# Altium PCB pc104_pattern.PcbDoc
Units mil, origin at the board's own origin, x right, y up, seen from the top; angles counter-clockwise.
Board outline 3550 x 3775 mil, 4 copper layers (HF Signal Layer, Ground, Supply Layer, LF Signal Layer), stack 62.087 mil thick; 2 components, 0 nets, 108 pads, 0 vias.
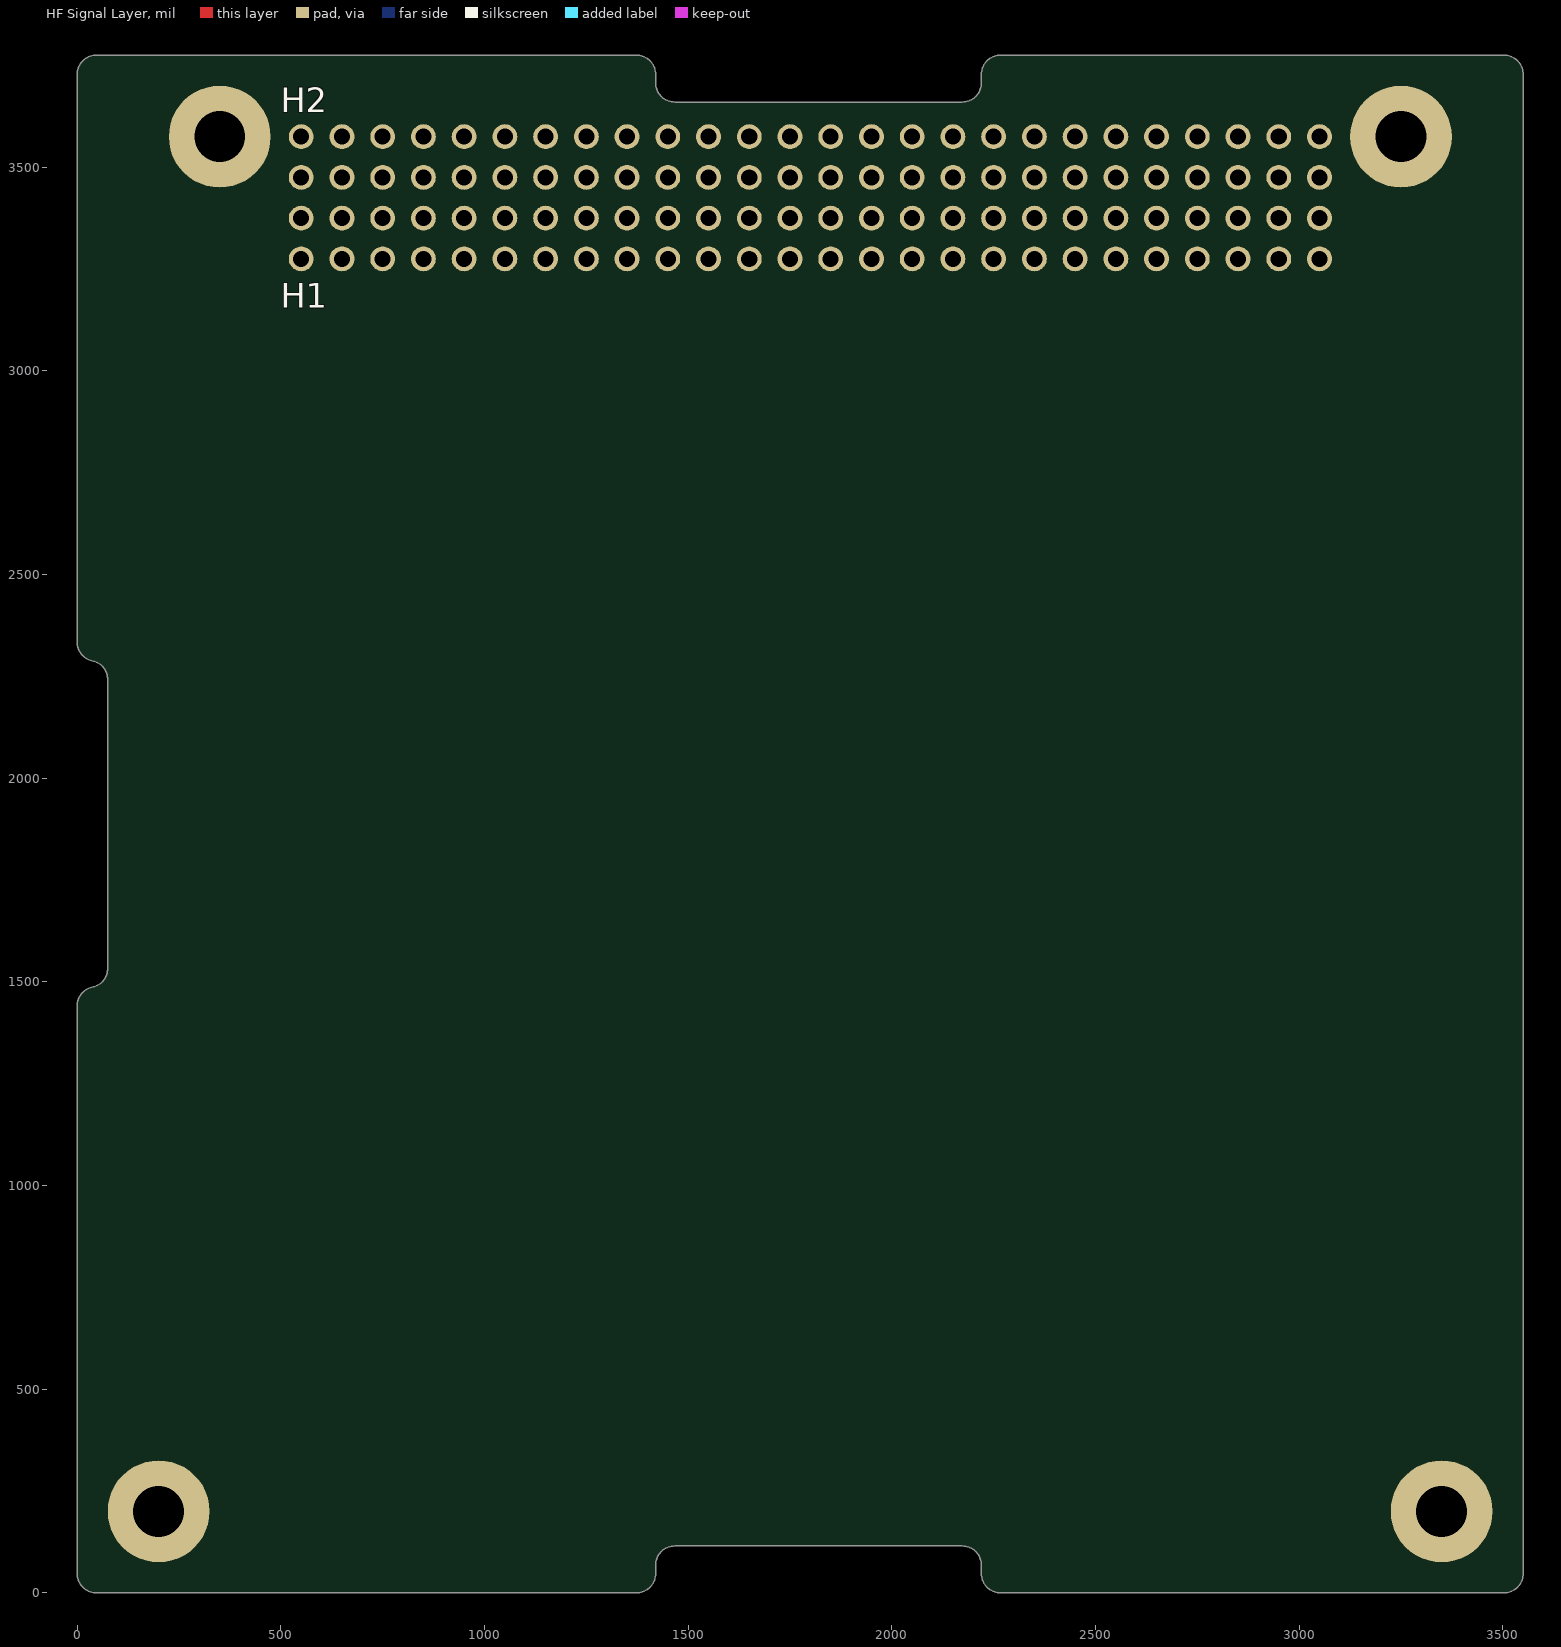
[diagram p0: HF Signal Layer view]
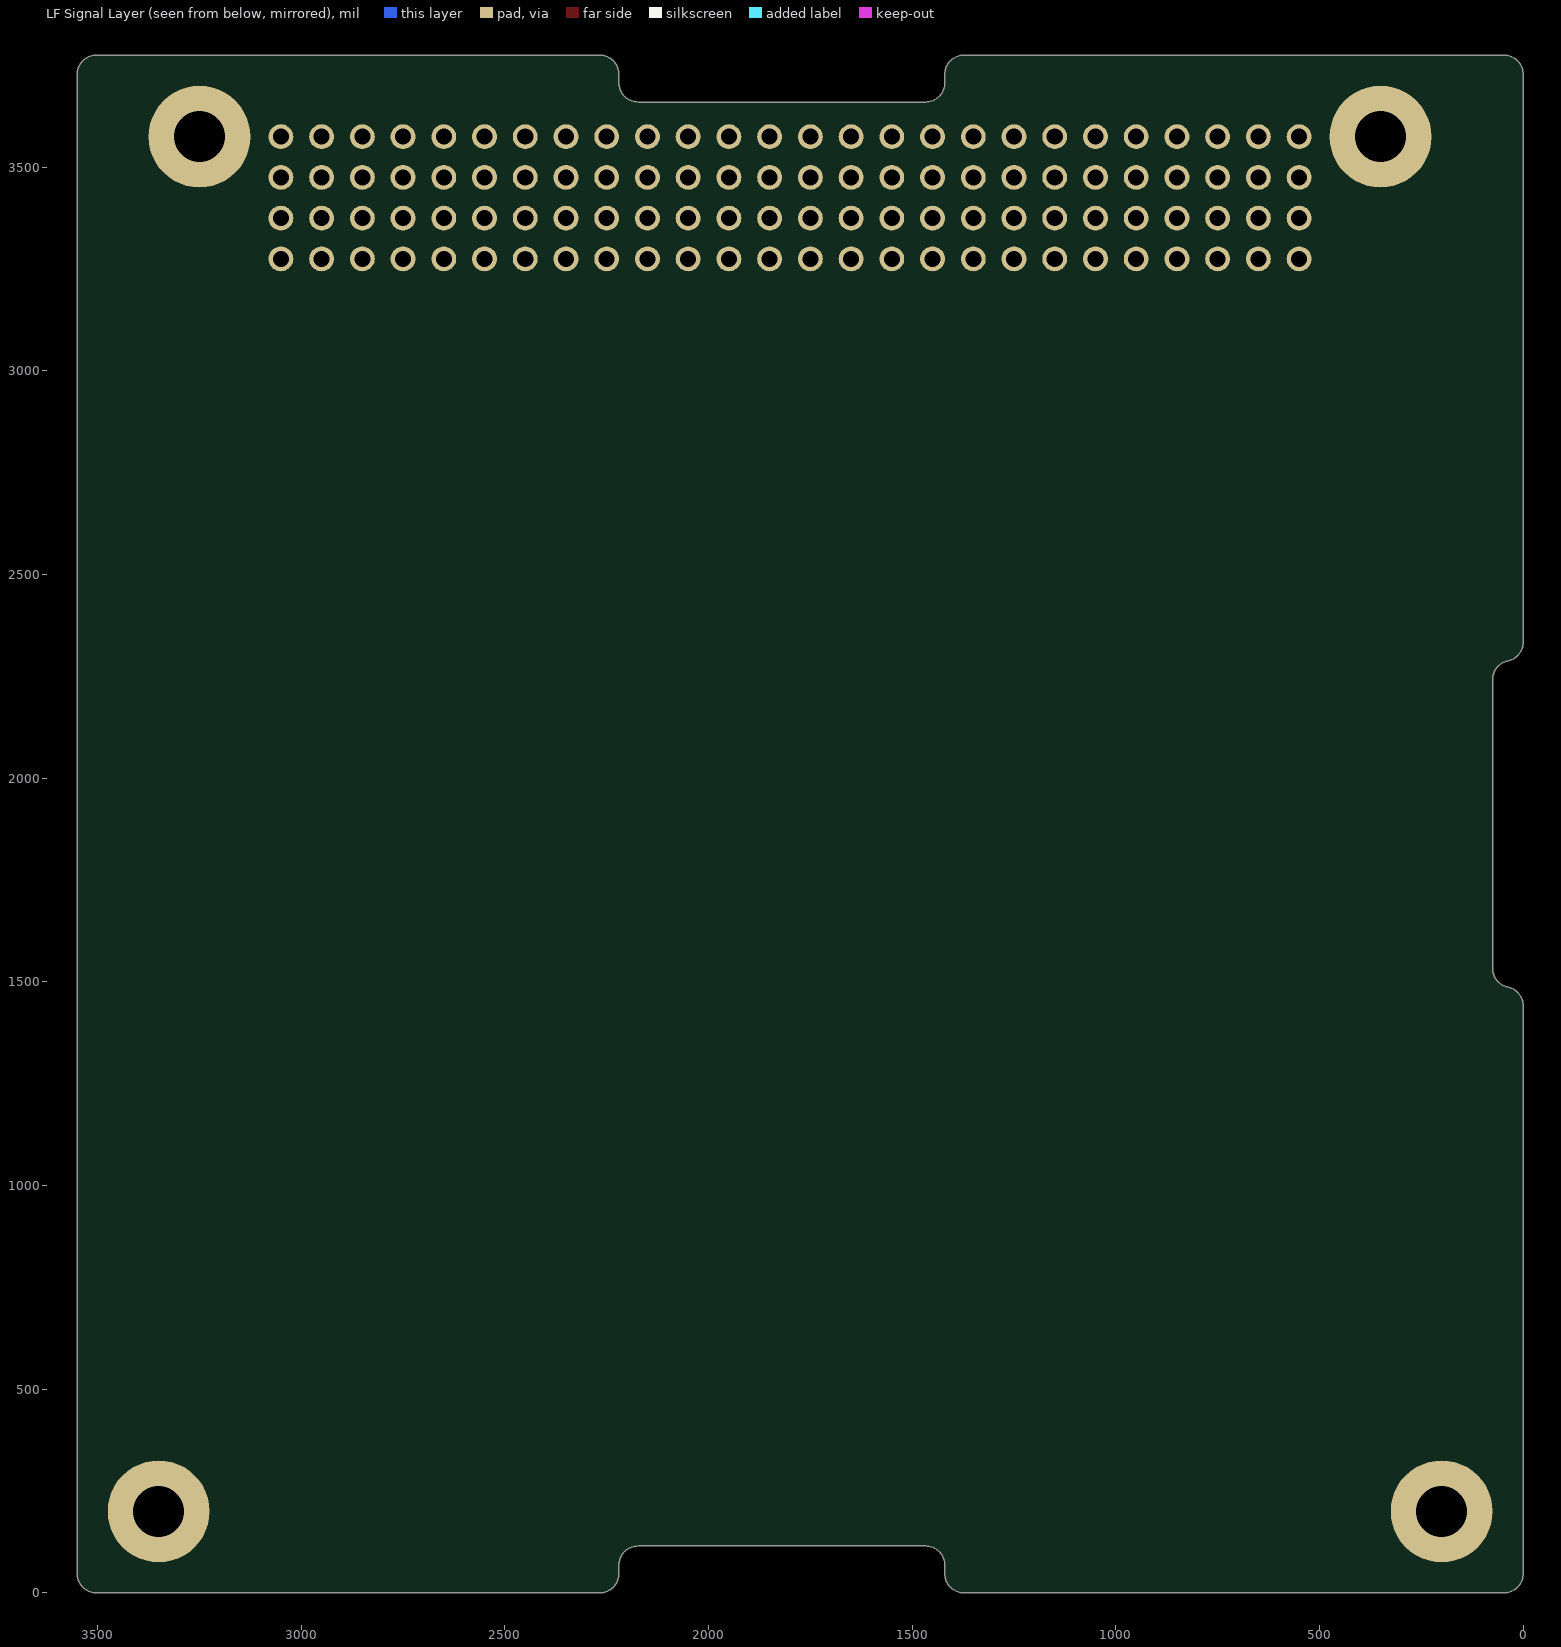
[diagram p1: LF Signal Layer view, seen from below]

## Layer stack, top to bottom
Top Solder: solder mask 0.3937, Solder Resist, Dk 3.5
HF Signal Layer: signal copper 0.7087
Dielectric Top: core 15, FR-4, Dk 4.2
Ground: signal copper 1.378
Dielectric Top-Bottom: prepreg 27.9134, FR-4, Dk 4.2
Supply Layer: signal copper 1.378
Dielectric Bottom: core 15, FR-4, Dk 4.2
LF Signal Layer: signal copper 0.7087
Bottom Solder: solder mask 0.3937, Solder Resist, Dk 3.5

## Board outline
47,0 cw(c47,47) 0,47 0,1441 cw(c47,1441) 39.65,1487.42 39.37,1487.4 ccw(c28,1533) 75,1533 75,2242 ccw(c28,2242) 39.37,2287.6 39.65,2287.58 cw(c47,2334) 0,2334 0,3728 cw(c47,3728) 47,3775 1373,3775 cw(c1373,3728) 1420,3728 1420,3707 ccw(c1467,3707) 1467,3660 2173,3660 ccw(c2173,3707) 2220,3707 2220,3728 cw(c2267,3728) 2267,3775 3503,3775 cw(c3503,3728) 3550,3728 3550,47 cw(c3503,47) 3503,0 2267,0 cw(c2267,47) 2220,47 2220,68 ccw(c2173,68) 2173,115 1467,115 ccw(c1467,68) 1420,68 1420,47 cw(c1373,47) 1373,0

## Design rules (kind name [scope] priority, off if disabled: settings)
Clearance [All] p1: gap=10
PolygonConnect [All] p1: connectstyle=Relief reliefconductorwidth=10 reliefentries=4 polygonreliefangle="90 Angle" airgapwidth=10
RoutingVias [All] p1: holewidth=28 width=50 viastyle="Through Hole" minholewidth=28 minwidth=50 maxholewidth=28 maxwidth=50
SolderMaskExpansion [All] p1: expansion=4
Width [All] p1: maxlimit=10 minlimit=10 preferedwidth=10
29 further rules are at their usual default settings.

## Components (designator, comment, footprint, x,y, rotation, side; value= is the part's Value field where it differs from the comment)
H1 "Comment" Samtec_Header_ESQ-126-39-G-D 550,3275 r0 top
H2 "Comment" Samtec_Header_ESQ-126-39-G-D 550,3475 r0 top

## Footprints (in the part's own frame and the unit in brackets; to place one, negate y for a bottom-side part, rotate by r counter-clockwise, add the part's x,y. Pads: shape width x height; smd on the part's side, far side on the other; paste and mask are expansions set on the pad)
Samtec_Header_ESQ-126-39-G-D [mm] "Samtec Header ESQ series. ESQ-126-39-G-D. PC-104 Stack."
  round 1.55 hole 1: 1(0,0) 2(0,2.54) 3(2.54,0) 4(2.54,2.54) 5(5.08,0) 6(5.08,2.54) 7(7.62,0) 8(7.62,2.54) 9(10.16,0) 10(10.16,2.54) 11(12.7,0) 12(12.7,2.54) 13(15.24,0) 14(15.24,2.54) 15(17.78,0) 16(17.78,2.54) 17(20.32,0) 18(20.32,2.54) 19(22.86,0) 20(22.86,2.54) 21(25.4,0) 22(25.4,2.54) 23(27.94,0) 24(27.94,2.54) 25(30.48,0) 26(30.48,2.54) 27(33.02,0) 28(33.02,2.54) 29(35.56,0) 30(35.56,2.54) 31(38.1,0) 32(38.1,2.54) 33(40.64,0) 34(40.64,2.54) 35(43.18,0) 36(43.18,2.54) 37(45.72,0) 38(45.72,2.54) 39(48.26,0) 40(48.26,2.54) 41(50.8,0) 42(50.8,2.54) 43(53.34,0) 44(53.34,2.54) 45(55.88,0) 46(55.88,2.54) 47(58.42,0) 48(58.42,2.54) 49(60.96,0) 50(60.96,2.54) 51(63.5,0) 52(63.5,2.54)
  body extent -1.52,-1.27 65.02,3.81, height 11.05

## Free pads (board coordinates)
  round 250 hole 125: 0(200,200) 0(350,3575) 0(3250,3575) 0(3350,200)

## Nets (pads, with @x,y where several pads share a name; then routed paths per layer and width w, separated by ;. In a path a pad name is that pad's centre, name@x,y a point inside that pad or via, vN(x,y) a via of type N, cw(c..) or ccw(c..) an arc to the next point about the centre after c; other vN are vias at no path point)
pads on no net: H1.1 H1.2 H1.3 H1.4 H1.5 H1.6 H1.7 H1.8 H1.9 H1.10 H1.11 H1.12 H1.13 H1.14 H1.15 H1.16 H1.17 H1.18 H1.19 H1.20 H1.21 H1.22 H1.23 H1.24 H1.25 H1.26 H1.27 H1.28 H1.29 H1.30 H1.31 H1.32 H1.33 H1.34 H1.35 H1.36 H1.37 H1.38 H1.39 H1.40 H1.41 H1.42 H1.43 H1.44 H1.45 H1.46 H1.47 H1.48 H1.49 H1.50 H1.51 H1.52 H2.1 H2.2 H2.3 H2.4 H2.5 H2.6 H2.7 H2.8 H2.9 H2.10 H2.11 H2.12 H2.13 H2.14 H2.15 H2.16 H2.17 H2.18 H2.19 H2.20 H2.21 H2.22 H2.23 H2.24 H2.25 H2.26 H2.27 H2.28 H2.29 H2.30 H2.31 H2.32 H2.33 H2.34 H2.35 H2.36 H2.37 H2.38 H2.39 H2.40 H2.41 H2.42 H2.43 H2.44 H2.45 H2.46 H2.47 H2.48 H2.49 H2.50 H2.51 H2.52

## Silkscreen, mask and mechanical layers (free items; w line width, h text height)
Mechanical 1:
  lines w10: 39.37,1487.4 ccw(c28,1533) 75,1533 75,2242 ccw(c28,2242) 39.37,2287.6 ; 39.65,1487.42 ccw(c47,1441) 0,1441 0,47 ccw(c47,47) 47,0 1373,0 ccw(c1373,47) 1420,47 1420,68 cw(c1467,68) 1467,115 2173,115 cw(c2173,68) 2220,68 2220,47 ccw(c2267,47) 2267,0 3503,0 ccw(c3503,47) 3550,47 3550,3728 ccw(c3503,3728) 3503,3775 2267,3775 ccw(c2267,3728) 2220,3728 2220,3707 cw(c2173,3707) 2173,3660 1467,3660 cw(c1467,3707) 1420,3707 1420,3728 ccw(c1373,3728) 1373,3775 47,3775 ccw(c47,3728) 0,3728 0,2334 ccw(c47,2334) 39.65,2287.58